# EAGLE board electronics_configuration (EAGLE 7.6.0)

Size 73.58 x 63.39 mm. Coordinates in mm from the lower left corner, seen from the top.
Outline: 0,0 56.82,0 56.82,53.33 0,53.33 0,0
Copper layers (1*16): Top 0.035mm / dielectric 1.5mm / Bottom 0.035mm
Design rules "default": minimum track width 10mil, minimum drill 24mil, track to track 8mil, track to pad 8mil, pad to pad 8mil, via to via 8mil, smd to smd 8mil, copper to edge 40mil, drill to drill 8mil, minimum pad ring 10mil, minimum via ring 8mil, stop-mask expansion 4mil, vias tented up to drill 0mil, thermal gap 10mil

## Footprints (pad centres in the part's own frame; a part is rotated, then mirrored left to right if it is on the bottom)
LED5MM = drill 0.813 octagon: A -1.27,0; K 1.27,0
M3XXH = drill 1.016 long: 1 -3.81,3.81; 2 -3.81,-3.81; O -6.35,-3.81; P 6.35,-3.81; P@ 6.35,3.81; S -6.35,3.81
2P-2.54-65/35MIL = drill 0.889 pad 1.651 square: 1 0,1.27 | drill 0.889 pad 1.651: 2 0,-1.27
0207/10 = drill 0.813 octagon: 1 -5.08,0; 2 5.08,0
ARDUINO_UNO = drill 1.016 pad 1.88: 0 63.5,50.8; 1 60.96,50.8; 2 58.42,50.8; 3 55.88,50.8; 3.3V 35.56,2.54; 4 53.34,50.8; 5 50.8,50.8; 5V 38.1,2.54; 6 48.26,50.8; 7 45.72,50.8; 8 41.656,50.8; 9 39.116,50.8; 10 36.576,50.8; 11 34.036,50.8; 12 31.496,50.8; 13 28.956,50.8; A0 50.8,2.54; A1 53.34,2.54; A2 55.88,2.54; A3 58.42,2.54; A4 60.96,2.54; A5 63.5,2.54; AREF 23.876,50.8; GND 26.416,50.8; GND. 43.18,2.54; GND.. 40.64,2.54; I/OREF 30.48,2.54; N/C 27.94,2.54; RESET 33.02,2.54; SCL 18.796,50.8; SDA 21.336,50.8; VIN 45.72,2.54 | hole 3.2: 66.04,7.62; 66.04,35.56; 15.24,50.8; 13.97,2.54

## Placement (x,y rotation side)
D2  [LED5MM]  5,429.18 0 top  (outside the outline)
D3  [LED5MM]  5,238.68 0 top  (outside the outline)
D4  [LED5MM]  5,251.38 0 top  (outside the outline)
D5  [LED5MM]  5,264.08 0 top  (outside the outline)
D6  [LED5MM]  5,276.78 0 top  (outside the outline)
D7  [LED5MM]  5,289.48 0 top  (outside the outline)
D8  [LED5MM]  5,302.18 0 top  (outside the outline)
D9  [LED5MM]  5,314.88 0 top  (outside the outline)
D10  [LED5MM]  5,327.58 0 top  (outside the outline)
D11  [LED5MM]  5,340.28 0 top  (outside the outline)
D12  [LED5MM]  5,200.58 0 top  (outside the outline)
D13  [LED5MM]  5,213.28 0 top  (outside the outline)
D15  [LED5MM]  5,352.98 0 top  (outside the outline)
D16  [LED5MM]  5,378.38 0 top  (outside the outline)
D17  [LED5MM]  5,391.08 0 top  (outside the outline)
D18  [LED5MM]  5,403.78 0 top  (outside the outline)
D19  [LED5MM]  5,441.88 0 top  (outside the outline)
D20  [LED5MM]  5,454.58 0 top  (outside the outline)
D21  [LED5MM]  5,479.98 0 top  (outside the outline)
D22  [LED5MM]  5,492.68 0 top  (outside the outline)
D23  [LED5MM]  5,505.38 0 top  (outside the outline)
D24  [LED5MM]  5,530.78 0 top  (outside the outline)
D25  [LED5MM]  5,543.48 0 top  (outside the outline)
D26  [LED5MM]  5,556.18 0 top  (outside the outline)
D27  [LED5MM]  5,594.28 0 top  (outside the outline)
D28  [LED5MM]  5,606.98 0 top  (outside the outline)
D29  [LED5MM]  5,619.68 0 top  (outside the outline)
D30  [LED5MM]  5,632.38 0 top  (outside the outline)
D31  [LED5MM]  5,645.08 0 top  (outside the outline)
D32  [LED5MM]  5,657.78 0 top  (outside the outline)
K3  [M3XXH]  5,22.78 0 top
K4  [M3XXH]  5,35.48 0 top
K5  [M3XXH]  5,48.18 0 top
K6  [M3XXH]  5,60.88 0 top
K7  [M3XXH]  5,73.58 0 top  (outside the outline)
K8  [M3XXH]  5,86.28 0 top  (outside the outline)
K9  [M3XXH]  5,98.98 0 top  (outside the outline)
K10  [M3XXH]  5,111.68 0 top  (outside the outline)
K11  [M3XXH]  5,124.38 0 top  (outside the outline)
K12  [M3XXH]  5,149.78 0 top  (outside the outline)
P1  18V  [2P-2.54-65/35MIL]  5,137.08 0 top  (outside the outline)
R1  1k‎Ω  [0207/10]  5,581.58 0 top  (outside the outline)
R2  1k‎Ω  [0207/10]  5,568.88 0 top  (outside the outline)
R3  1k‎Ω  [0207/10]  5,518.08 0 top  (outside the outline)
R4  1k‎Ω  [0207/10]  5,467.28 0 top  (outside the outline)
R6  1k‎Ω  [0207/10]  5,416.48 0 top  (outside the outline)
R7  1k‎Ω  [0207/10]  5,365.68 0 top  (outside the outline)
R8  1k‎Ω  [0207/10]  5,162.48 0 top  (outside the outline)
R9  1k‎Ω  [0207/10]  5,175.18 0 top  (outside the outline)
R10  1k‎Ω  [0207/10]  5,225.98 0 top  (outside the outline)
R21  1k‎Ω  [0207/10]  5,187.88 0 top  (outside the outline)
U1  [ARDUINO_UNO]  5,10.08 0 top

## Library data of the parts
D2-D13 D15-D32 K3-K12 P1 R1-R4 R6-R10 R21 U1 = AUTODESK_CIRCUITS_BREADBOARD

## Nets
N$1: K10.2 U1.2
N$2: K11.2 U1.1
N$3: K12.2 U1.0
N$4: K11.S R21.1
N$5: K11.P
N$6: K11.O
N$7: K10.P
N$8: K10.O
N$9: K9.P
N$10: K9.O
N$11: K9.2 U1.3
N$12: K8.P
N$13: K8.O
N$14: K8.2 U1.4
N$15: K7.P
N$16: K7.O
N$17: K7.2 U1.5
N$18: K6.P
N$19: K6.O
N$20: K6.2 U1.6
N$21: K5.P
N$22: K5.O
N$23: K5.2 U1.7
N$24: K4.P
N$25: K4.O
N$26: K4.2 U1.8
N$27: K3.2 U1.9
N$28: K3.P
N$29: K3.O
N$30: K3.S R1.1
N$31: K4.S R2.1
N$32: K5.S R3.1
N$33: K6.S R4.1
N$34: K7.S R6.1
N$35: K8.S R7.1
N$36: K9.S R8.1
N$37: K10.S R9.1
N$38: K3.P@ K4.P@ K5.P@ K6.P@ K7.P@ K8.P@ K9.P@ K10.P@ K11.P@ K12.P@ P1.2
N$39: K12.P
N$40: K12.O
N$41: K12.S R10.1
N$42: D2.K D3.K D4.K D5.K D6.K D7.K D8.K D9.K D10.K D11.K D12.K D13.K D15.K D16.K D17.K D18.K D19.K D20.K D21.K D22.K D23.K D24.K D25.K D26.K D27.K D28.K D29.K D30.K D31.K D32.K K3.1 K4.1 K5.1 K6.1 K7.1 K8.1 K9.1 K10.1 K11.1 K12.1 P1.1 U1.GND
N$43: D3.A D12.A D13.A R10.2
N$44: D4.A D5.A D6.A R21.2
N$45: D7.A D8.A D9.A R9.2
N$46: D10.A D11.A D15.A R8.2
N$47: D16.A D17.A D18.A R7.2
N$48: D2.A D19.A D20.A R6.2
N$49: D21.A D22.A D23.A R4.2
N$50: D24.A D25.A D26.A R3.2
N$51: D27.A D28.A D29.A R2.2
N$52: D30.A D31.A D32.A R1.2

## Tracks (layer width: path | path; a pad name or v marks a point on that pad's centre or on a via)
N$1  (1 unrouted)
N$2  (1 unrouted)
N$3  (1 unrouted)
N$4  (1 unrouted)
N$11  (1 unrouted)
N$14  (1 unrouted)
N$17  (1 unrouted)
N$20  (1 unrouted)
N$23  (1 unrouted)
N$26  (1 unrouted)
N$27  (1 unrouted)
N$30  (1 unrouted)
N$31  (1 unrouted)
N$32  (1 unrouted)
N$33  (1 unrouted)
N$34  (1 unrouted)
N$35  (1 unrouted)
N$36  (1 unrouted)
N$37  (1 unrouted)
N$38  (10 unrouted)
N$41  (1 unrouted)
N$42  (41 unrouted)
N$43  (3 unrouted)
N$44  (3 unrouted)
N$45  (3 unrouted)
N$46  (3 unrouted)
N$47  (3 unrouted)
N$48  (3 unrouted)
N$49  (3 unrouted)
N$50  (3 unrouted)
N$51  (3 unrouted)
N$52  (3 unrouted)